# Altium PCB Wi-FiR.PcbDoc (part 3 of 3)
Units mm, origin at the board's own origin, x right, y up, seen from the top; angles counter-clockwise.
Board outline 58.03 x 53.68 mm, 2 copper layers (Top Layer, Bottom Layer); 105 components, 77 nets, 361 pads, 200 vias.
Unrouted connection lines stored in the file: 1.
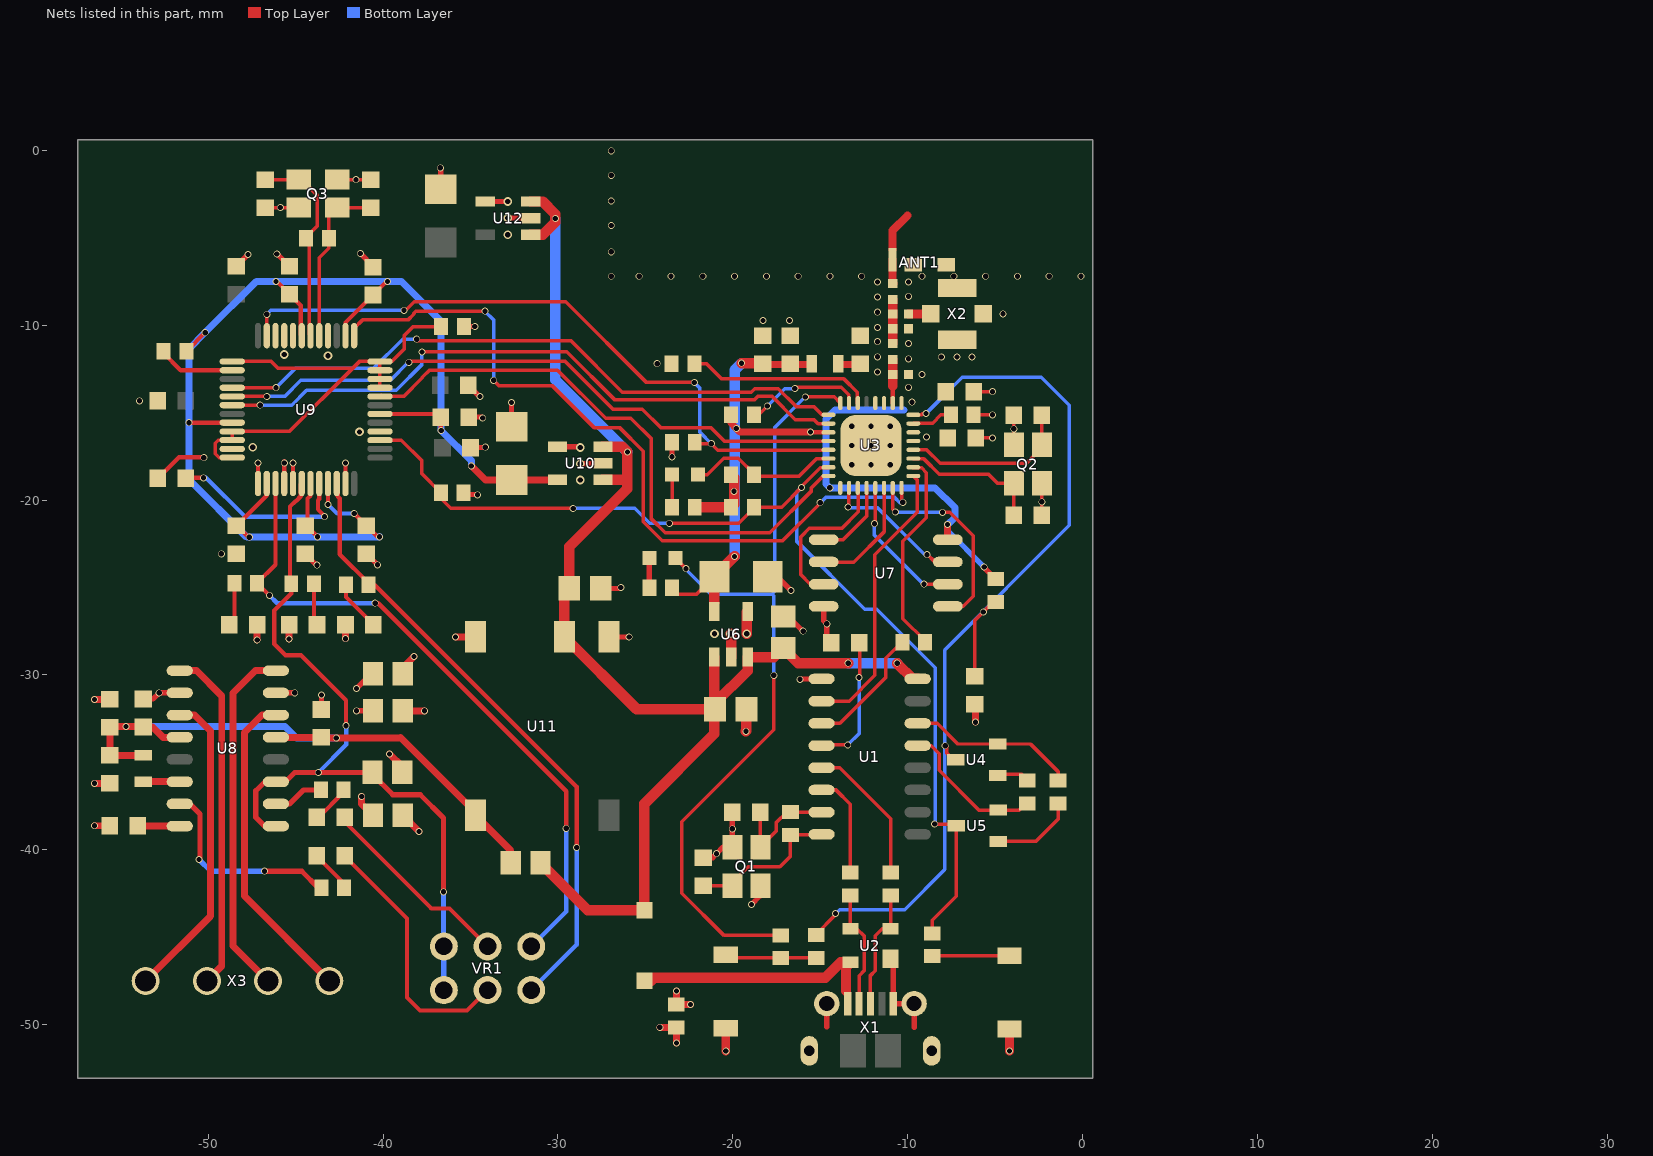
[diagram p2: the nets of this part, all layers, seen from the top]

## Via types
v1: diameter 0.4, hole 0.3, Top Layer to Bottom Layer, tented both sides, 178 vias
v2: diameter 0.5, hole 0.3, Top Layer to Bottom Layer, tented both sides, 13 vias
v3: diameter 0.5, hole 0.3, Top Layer to Bottom Layer, 9 vias

## Nets (pads, with @x,y where several pads share a name; then routed paths per layer and width w, separated by ;. In a path a pad name is that pad's centre, name@x,y a point inside that pad or via, vN(x,y) a via of type N, cw(c..) or ccw(c..) an arc to the next point about the centre after c; other vN are vias at no path point) (continued)
3v3: C23.1 C24.2 C25.2 C26.2 C36.2 C37.2 C38.2 R25.1 U9.6 U9.14 U9.19 U9.32 U9.38 U9.43 U9.45 U10.5 | length 79.8
  Top Layer w0.24: R25.1@-51.25,-11.5 v1(-50.175,-10.425) ; v1(-51.1,-15.575) U9.32@-48.625,-15.575 ; C24.2@-48.4,-21.475 C24.2@-48.396,-21.475 ; v1(-47.65,-22.125) -47.7,-22.125 -48.35,-21.475 C24.2@-48.396,-21.475 ; U9.38@-46.65,-19.05 -46.65,-19.725 -46.705,-19.78 -46.705,-19.784 C24.2@-48.396,-21.475 ; v1(-46.125,-7.5) -46.075,-7.5 C37.2@-45.35,-8.225 -44.705,-8.87 -44.705,-10.545 U9.19@-44.65,-10.6 ; U9.43@-44.15,-19.05 -44.15,-19.751 -44.315,-19.916 -44.315,-21.34 C26.2@-44.45,-21.475 -44.375,-21.475 v1(-43.75,-22.1) ; v1(-43.15,-20.25) U9.45@-43.15,-19.05 ; U9.14@-42.15,-10.6 -42.15,-9.85 C38.2@-40.575,-8.275 -39.8,-7.5 v1(-39.752,-7.5) ; v1(-41.65,-20.775) C25.2@-40.95,-21.475 -40.325,-22.1 v1(-40.2,-22.1) ; U9.6@-40.175,-15.075 C36.2@-36.7,-15.075 ; C36.2@-36.7,-15.25 -36.7,-16 v1(-36.675,-16.025)
  Top Layer w0.4: v1(-34.95,-18.05) -34.15,-18.85 C23.1@-32.65,-18.85 U10.5@-30.025,-18.85
  Bottom Layer w0.24: v1@-46.125,-7.55 v1(-46.125,-7.5) ; v1(-43.15,-20.25) -42.625,-20.775 v1(-41.65,-20.775) ; v1(-39.752,-7.5) -39.75,-7.498 v1@-39.75,-7.475
  Bottom Layer w0.4: v1@-40.2,-22.075 v1(-40.2,-22.1) v1(-43.75,-22.1) -47.625,-22.1 v1(-47.65,-22.125) -47.794,-22.125 -51.1,-18.819 v1(-51.1,-15.575) -51.1,-11.35 v1(-50.175,-10.425) -47.25,-7.5 v1(-39.752,-7.5) -38.946,-7.5 -36.675,-9.771 v1(-36.675,-16.025) -34.95,-17.75 v1(-34.95,-18.05)
+5V: C1.2 C15.2 C42.2 D1.2 R30.1 U1.16 U6.1 U6.3 U10.1 U10.3 U11.2 U12.1 U12.3 | length 81.9
  Top Layer w0.6: U12.1@-31.55,-4.825 -30.872,-4.825 -30.15,-4.103 v1(-30.15,-3.9) -30.15,-3.647 -30.872,-2.925 U12.3@-31.55,-2.925 ; R30.1@-31,-40.75 -28.3,-43.45 D1.2@-25.05,-43.45 -25.05,-37.375 -21.05,-33.375 C15.2@-21.05,-31.95 ; U10.1@-27.425,-18.85 -26.075,-18.85 -26.025,-18.8 ; U10.3@-27.425,-16.95 -26.325,-16.95 v1(-26.025,-17.25) -26.025,-18.8 ; U6.1@-21.05,-28.975 C15.2@-21.05,-31.95 ; v1(-13.4,-29.325) -16.25,-29.325 C1.2@-17.125,-28.45 -17.65,-28.975 U6.3@-19.15,-28.975 -19.15,-29.75 -21.025,-31.625 C15.2@-21.025,-31.95 C15.2@-21.05,-31.95 ; v1(-10.6,-29.325) -10.6,-29.35 -9.72,-30.23 U1.16@-9.425,-30.23 ; -26.025,-18.8 -26.025,-19.35 -29.35,-22.675 C42.2@-29.35,-25.05 -29.63,-25.33 U11.2@-29.63,-27.825 -25.505,-31.95 C15.2@-21.05,-31.95
  Bottom Layer w0.6: v1(-30.15,-3.9) -30.15,-13.125 v1(-26.025,-17.25) ; v1(-13.4,-29.325) v1(-10.6,-29.325)
ADC: R17.2 U3.6 | length 10.7
  Top Layer w0.2: R17.2@-22.2,-12.2 -21.5,-12.2 -20.624,-13.076 -13.641,-13.076 -12.875,-13.842 -12.875,-14.45 U3.6@-12.85,-14.45 U3.6@-12.825,-14.425
AGND: C32.2 C33.2 C34.2 C41.1 R22.1 R27.2 U9.37 U9.40 U9.41 U9.47 | length 13.7
  Top Layer w0.24: C41.1@-52.875,-18.75 -51.675,-17.55 -50.225,-17.55 v1(-50.25,-17.575) ; U9.37@-47.15,-19.05 v1(-47.15,-17.875) ; U9.40@-45.65,-19.05 v1(-45.65,-17.875) v1@-45.65,-17.775 ; U9.41@-45.15,-19.05 v1(-45.15,-17.875) v1@-45.15,-17.8 ; U9.47@-42.15,-19.05 v1(-42.15,-17.875) v1@-42.15,-17.85
  Top Layer w0.4: v1(-47.2,-28) C33.2@-47.2,-27.125 ; v1(-45.375,-27.95) C34.2@-45.375,-27.125 ; v1(-42.15,-27.925) C32.2@-42.15,-27.125 ; R22.1@-38.875,-38.025 v1(-37.95,-38.95) ; v1(-24.175,-50.15) R27.2@-23.225,-50.15 v1(-23.225,-51.05)
AMP_GND: C18.1 C19.1 C22.2 R19.2 R21.1 R22.2 U11.4 | length 7.7
  Top Layer w0.4: v1(-56.5,-38.625) C22.2@-55.625,-38.625 ; v1(-56.5,-36.2) C19.1@-55.625,-36.2 ; v1(-56.5,-31.4) C18.1@-55.625,-31.4 ; v1(-41.225,-36.95) -41.225,-37.375 R22.2@-40.575,-38.025 ; v1(-39.625,-34.525) -38.9,-35.25 R19.2@-38.9,-35.575 ; R21.1@-38.875,-32.05 v1(-37.625,-32.05) ; v1(-35.85,-27.825) U11.4@-34.71,-27.825
AMP_PWR: C18.2 C19.2 C20.2 C21.2 L3.1 R30.2 U8.4 U8.13 U11.5 | length 37
  Top Layer w0.4: L3.1@-53.725,-34.6 C19.2@-55.625,-34.6 C18.2@-55.625,-33 -55.575,-32.95 v1(-54.7,-32.95) -53.75,-32.95 C20.2@-53.725,-32.975 -53.175,-32.975 -52.585,-33.565 U8.4@-51.625,-33.565 ; U8.13@-46.125,-33.565 -46.115,-33.575 C21.2@-43.525,-33.575 -43.5,-33.6 v1(-42.675,-33.6) -39.039,-33.6 -39.014,-33.575 -34.71,-37.879 U11.5@-34.71,-38.025 -32.7,-40.035 R30.2@-32.7,-40.75
  Bottom Layer w0.4: v1(-54.7,-32.95) -45.6,-32.95 -44.95,-33.6 v1(-42.675,-33.6)
APWR: C3.2 C4.2 C5.2 C6.2 C17.1 L1.1 R6.1 R8.2 R14.1 R33.1 R34.1 R35.1 U3.1 U3.11 U3.17 U3.29 U3.30 U6.5 U7.8 | length 54.2
  Top Layer w0.2: R8.2@-23.475,-25.025 -23.125,-25.375 -22.05,-25.375 C17.1@-21.05,-24.375
  Top Layer w0.24: R34.1@-20.1,-15.6 R34.1@-20.1,-15.125 ; v1@-15.55,-16.125 U3.11@-14.525,-16.125
  Top Layer w0.3: v1(-5.625,-23.825) -5.625,-23.85 R35.1@-5.05,-24.425
  Top Layer w0.4: R34.1@-20.1,-15.6 v1(-19.8,-15.9) -19.6,-16.1 v1(-15.55,-16.1) ; C6.2@-18.275,-12.25 -16.725,-12.25 L1.1@-15.475,-12.25 ; v1(-7.725,-21.4) -7.725,-22.245 U7.8@-7.7,-22.27
  Top Layer w0.6: R14.1@-22.175,-20.4 R6.1@-20.1,-20.4 -19.925,-20.225 v1(-19.925,-19.5) -19.925,-18.725 R33.1@-20.1,-18.55 ; U6.5@-21.05,-25.85 C17.1@-21.05,-24.375 v1(-19.9,-23.225) ; v1(-19.5,-12.175) -18.35,-12.175 C6.2@-18.275,-12.25
  Bottom Layer w0.3: v1(-7.725,-21.4) -7.725,-21.725 v1(-5.625,-23.825)
  Bottom Layer w0.4: -10.2,-14.85 -14.15,-14.85 -14.675,-15.375 -14.675,-19.075 v1(-14.45,-19.3) -8.431,-19.3 -7.3,-20.431 -7.3,-20.994 -7.706,-21.4 v1(-7.725,-21.4)
  Bottom Layer w0.6: v1(-19.9,-23.225) -19.9,-12.575 v1(-19.5,-12.175)
  other v1: -8.925,-16.4 -9.75,-14.4
CN-PD: R34.2 U3.7 | length 6.7
  Top Layer w0.2: R34.2@-18.8,-15.125 -18.525,-15.125 v1(-18.025,-14.625) ; v1(-16.451,-13.626) -16.376,-13.551 -13.803,-13.551 -13.375,-13.978 -13.375,-14.425 U3.7@-13.35,-14.45
  Bottom Layer w0.2: v1(-18.025,-14.625) -17.026,-13.626 v1(-16.451,-13.626)
DTR: R4.2 U1.13 U5.2 | length 8.6
  Top Layer w0.2: U1.13@-9.425,-34.04 -8.66,-34.04 -8.2,-34.5 -8.2,-35.45 -5.925,-37.725 U5.2@-4.825,-37.725 -3.625,-37.725 R4.2@-3.15,-37.25
GB: R19.1 R24.1 U8.9 U8.11 U9.42 VR1.1 VR1.1' | length 45.2
  Top Layer w0.24: U9.42@-44.65,-19.05 -44.705,-19.105 -44.705,-19.784 -44.966,-20.045 -44.995,-20.045 -45.32,-20.37 -45.32,-24.775 R24.1@-45.25,-24.775 -45.25,-25.35 -46.22,-26.32 -46.22,-28.23 -45.575,-28.875 -44.7,-28.875 -42.125,-31.45 v1(-42.125,-32.9)
  Top Layer w0.3: U8.9@-46.125,-38.645 -46.78,-38.645 -47.275,-38.15 -47.275,-36.625 -46.755,-36.105 U8.11@-46.125,-36.105 -45.58,-36.105 -45.05,-35.575 R19.1@-40.6,-35.575 -40.6,-35.691 -39.441,-36.85 -37.875,-36.85 -36.55,-38.175 v1(-36.55,-42.4)
  Bottom Layer w0.24: v1(-43.7,-35.575) -42.105,-33.98 -42.105,-32.92 v1(-42.125,-32.9)
  Bottom Layer w0.3: v1(-36.55,-42.4) -36.55,-45.5 VR1.1@-36.525,-45.525 VR1.1'@-36.525,-48.025
GND: ANT1.1@-7.8,-6.54 ANT1.1@-9.68,-6.54 C1.1 C2.2 C3.1 C4.1 C5.1 C6.1 C7.1 C8.1 C9.1 C10.1 C11.1 C12.1 C13.1 C14.1 C15.1 C17.2 C23.2 C24.1 C25.1 C26.1 C27.2 C28.1 C29.1 C30.1 C31.1 C36.1 C37.1 C38.1 C39.1 C40.1 C42.1 Q1.2 Q1.4 Q2.2 Q2.4 Q3.2 Q3.4 R3.2 R13.1 R17.1 R26.1 R27.1 R28.1 R29.1 SW1.1 SW2.2 U1.1 U2.1 U3.33 U6.2 U6.4 U7.4 U9.4 U9.16 U9.20 U9.21 U9.22 U9.35 U10.2 U10.4 U11.1 U12.2 U12.4 X1.5 X2.2 X2.3 X2.4 | length 59.4
  Top Layer w0.2: C39.1@-46.725,-3.275 v1(-45.875,-3.275) Q3.4@-44.825,-3.275 ; Q3.2@-42.625,-1.675 v1(-41.55,-1.675) C40.1@-40.7,-1.675 ; R3.2@-6.225,-15.125 v1@-5.3,-15.125 ; C3.1@-6.225,-13.8 v1@-5.325,-13.8 ; C4.1@-6.1,-16.45 v1(-5.15,-16.45) ; Q2.2@-3.925,-16.85 v1(-3.925,-15.925) C12.1@-3.925,-15.15 ; C13.1@-2.325,-20.875 v1(-2.325,-20.1) Q2.4@-2.325,-19.05
  Top Layer w0.3: C30.1@-48.4,-6.625 v1(-47.725,-5.95) ; v1(-46.075,-5.925) -46.05,-5.925 C37.1@-45.35,-6.625 ; C26.1@-44.45,-23.075 -43.8,-23.725 v1(-43.775,-23.725) ; v1(-41.3,-5.9) -40.575,-6.625 C38.1@-40.575,-6.675 ; C25.1@-40.95,-23.075 v1(-40.325,-23.7) ; v1(-36.725,-1) -36.7,-1.025 C27.2@-36.7,-2.225 ; R29.1@-35.4,-19.575 -35.3,-19.675 -34.625,-19.675 v1(-34.6,-19.7) ; R26.1@-35.375,-10.075 v1(-34.75,-10.075) ; C29.1@-35.125,-13.425 -34.475,-14.075 v1(-34.45,-14.075) ; C36.1@-35.1,-15.25 -34.35,-15.25 v1(-34.3,-15.3) ; C28.1@-35,-17 -34.175,-17 v1(-34.15,-16.975) ; U12.4@-34.15,-2.925 v2(-32.875,-2.925) ; v2(-32.875,-3.875) U12.2@-31.55,-3.875 ; C23.2@-32.65,-15.8 v1(-32.65,-14.425) ; U10.4@-30.025,-16.95 -28.775,-16.95 v2(-28.725,-17) ; v2(-28.725,-17.925) -27.45,-17.925 U10.2@-27.425,-17.9 ; C42.1@-27.55,-25.05 -26.45,-25.05 v1(-26.4,-25) ; U11.1@-27.09,-27.825 v1(-25.925,-27.825) ; R17.1@-23.65,-12.2 R17.1@-23.5,-12.2 ; v1(-23.475,-17.525) R13.1@-23.475,-16.7 ; C9.1@-21.7,-40.45 -21.15,-40.45 v1(-20.925,-40.225) -20.55,-39.85 Q1.4@-20.025,-39.85 v1(-20.025,-38.8) C8.1@-20.025,-37.85 ; v1(-18.925,-43.125) -18.425,-42.625 Q1.2@-18.425,-42.05 ; C17.2@-18,-24.375 -17.475,-24.375 v1(-16.675,-25.175) ; C1.1@-17.125,-26.65 -16.825,-26.65 v1(-15.975,-27.5) ; v1(-16.15,-30.25) -16.13,-30.23 U1.1@-14.925,-30.23 ; U7.4@-14.8,-26.08 -14.8,-26.9 v1(-14.625,-27.075) -14.625,-27.9 C2.2@-14.375,-28.15 ; -14.625,-50.125 X1.5@-14.625,-48.8 ; U2.1@-10.98,-46.225 -10.825,-46.38 X1.5@-10.825,-48.8 X1.5@-9.625,-48.8 -9.625,-50.15
  Top Layer w0.4: R28.1@-38.875,-29.925 -38.875,-29.6 v1(-38.225,-28.95) ; v1(-23.225,-48.075) R27.1@-23.225,-48.85 v1(-22.425,-48.85) ; C14.1@-6.175,-31.675 -6.075,-31.775 -6.125,-31.825 v1(-6.125,-32.7)
  Top Layer w0.5: v1(-20.4,-51.5) SW1.1@-20.4,-50.2 ; X1.5@-15.625,-51.5 X1.5@-15.6,-51.475 ; X1.5@-8.625,-51.5 X1.5@-8.625,-51.157 ; v1(-4.175,-51.5) SW2.2@-4.175,-50.25
  Top Layer w0.6: v2(-20.125,-27.65) -20.1,-27.675 U6.2@-20.1,-28.975 ; v1(-19.25,-33.225) -19.225,-33.2 C15.1@-19.225,-31.95 ; v2(-19.2,-27.65) -19.2,-26.425 U6.4@-19.15,-26.375
  other v1: -49.25,-23.075 -5.15,-15.125 -53.925,-14.325 -5.15,-13.8 -9.95,-13.55 -9.175,-12.825 -11.725,-12.675 -24.325,-12.2 -9.95,-11.925 -11.725,-11.808 -8.075,-11.825 -7.175,-11.825 -6.325,-11.825 -9.95,-11.05 -11.725,-10.942 -11.725,-10.125 -18.275,-9.725 -16.75,-9.725 -4.55,-9.35 -11.725,-9.258 -11.725,-8.392 -9.95,-8.35 -11.725,-7.525 -9.95,-7.525 -26.95,-7.2 -25.35,-7.2 -23.532,-7.2 -21.714,-7.2 -19.896,-7.2 -18.079,-7.2 -16.261,-7.2 -14.443,-7.2 -12.625,-7.2 -9.175,-7.2 -7.357,-7.2 -5.539,-7.2 -3.721,-7.2 -1.904,-7.2 -0.086,-7.2 -26.95,-5.8 -26.95,-4.3 -26.95,-2.9 -26.95,-1.425 -26.95,-0.025
  other v2: -21.05,-27.65 -28.725,-18.85 -47.45,-16.975 -41.35,-16.1 -43.15,-11.75 -45.65,-11.675 -32.875,-4.825
  other v3: -13.2,-17.975 -12.1,-17.975 -11,-17.975 -13.2,-16.875 -12.1,-16.875 -11,-16.875 -13.2,-15.775 -12.1,-15.775 -11,-15.775
GPIO00: R6.2 R15.1 R29.2 U3.15 U5.3 U9.3 | length 60.4
  Top Layer w0.2: U9.3@-40.175,-16.575 -38.95,-16.575 -37.8,-17.725 -37.8,-18.475 R29.2@-36.7,-19.575 -36.7,-19.9 -36.125,-20.475 v1(-29.125,-20.475) ; v1(-23.626,-21.326) -19.656,-21.326 -18.8,-20.47 R6.2@-18.8,-20.4 ; R6.2@-18.575,-20.4 -17.191,-20.4 v1(-16.075,-19.284) -16.075,-19.228 -14.997,-18.15 -14.55,-18.15 U3.15@-14.525,-18.125 ; R15.1@-8.6,-44.775 -8.6,-44.025 -7.225,-42.65 U5.3@-7.225,-38.625 -7.323,-38.527 v1(-8.45,-38.527)
  Bottom Layer w0.2: v1(-29.125,-20.475) -25.6,-20.475 -24.749,-21.326 v1(-23.626,-21.326) ; v1(-16.075,-19.284) -16.327,-19.536 -16.327,-22.373 -12.45,-26.25 -11.775,-26.25 -8.425,-29.6 -8.425,-38.502 v1(-8.45,-38.527)
GPIO02: D4.2 R33.2 U3.14 | length 8.7
  Top Layer w0.2: D4.2@-21.975,-18.55 -21.47,-18.55 -20.52,-17.6 -19.68,-17.6 -18.8,-18.48 R33.2@-18.8,-18.55 ; R33.2@-18.775,-18.625 -16.194,-18.625 -15.219,-17.65 -14.55,-17.65 U3.14@-14.525,-17.625
GPIO04: U3.16 U9.8 | length 34.4
  Top Layer w0.2: U9.8@-40.1,-14 U9.8@-40.175,-14.075 -38.825,-14.075 -37.75,-13 -37.75,-12.98 -37.345,-12.575 -30.025,-12.575 -27.275,-15.325 -25.825,-15.325 -24.675,-16.475 -24.675,-21.055 -23.854,-21.876 -20.29,-21.876 -20.289,-21.875 -19.461,-21.875 -19.46,-21.876 -17.89,-21.876 -15.525,-19.512 -15.525,-19.315 -14.835,-18.625 U3.16@-14.525,-18.625
GPIO05: U3.24 U9.13 | length 44.1
  Top Layer w0.2: U9.13@-41.65,-10.6 -41.65,-10.175 -41.175,-9.7 -38.572,-9.7 -38.25,-9.378 -38.25,-9.33 -38.12,-9.2 v1(-34.175,-9.2) ; v1(-33.675,-13.15) -33.375,-13.45 -30.336,-13.45 -27.936,-15.85 -26.475,-15.85 -25.125,-17.2 -25.125,-21.241 -24.04,-22.326 -20.104,-22.326 -20.103,-22.325 -19.647,-22.325 -19.646,-22.326 -17.154,-22.326 -15,-20.172 v1(-15,-20.15) ; U3.24@-10.35,-19.3 -10.35,-20.051 v1(-10.276,-20.126)
  Bottom Layer w0.2: v1(-34.175,-9.2) -33.675,-9.7 v1(-33.675,-13.15) ; v1(-15,-20.15) -14.978,-20.15 -14.678,-19.85 -10.749,-19.85 -10.448,-20.151 -10.276,-20.151 v1(-10.276,-20.126)
GPIO12: U3.10 U9.30 | length 37.7
  Top Layer w0.2: U9.30@-48.625,-14.575 v1(-47.025,-14.575) ; v1(-37.775,-11.525) -29.489,-11.525 -26.739,-14.275 -18.761,-14.275 -18.561,-14.075 -17.75,-14.075 -16.429,-15.396 -15.354,-15.396 -15.125,-15.625 U3.10@-14.525,-15.625 U3.10@-14.55,-15.6
  Bottom Layer w0.2: v1(-47.025,-14.575) -45.225,-14.575 -44.375,-13.725 -39.25,-13.725 -37.775,-12.25 v1(-37.775,-11.525)
GPIO13: U3.12 U9.29 | length 36.9
  Top Layer w0.2: U9.29@-48.625,-14.075 v1(-46.65,-14.075) ; v1(-38.525,-12.125) -38.525,-12.175 -38.425,-12.075 -29.575,-12.075 -26.85,-14.8 -25.175,-14.8 -24.125,-15.85 -21.25,-15.85 -20.45,-16.65 -14.55,-16.65 U3.12@-14.525,-16.625
  Bottom Layer w0.2: v1(-46.65,-14.075) -45.625,-14.075 -44.7,-13.15 -39.575,-13.15 -38.55,-12.125 v1(-38.525,-12.125)
GPIO14: U3.9 U9.28 | length 37.2
  Top Layer w0.2: U9.28@-48.601,-13.6 U9.28@-48.625,-13.575 v1(-46.125,-13.575) ; v1(-38.075,-10.8) -37.975,-10.9 -29.236,-10.9 -26.311,-13.825 -18.948,-13.825 -18.748,-13.625 -17.4,-13.625 -16.374,-14.651 -15.374,-14.651 -14.9,-15.125 U3.9@-14.525,-15.125
  Bottom Layer w0.2: v1(-46.125,-13.575) -45.025,-12.475 -40.55,-12.475 -38.875,-10.8 v1(-38.075,-10.8)
GPIO15: R13.2 U3.13 U9.23 | length 39.6
  Top Layer w0.2: U9.23@-46.65,-10.6 v1(-46.65,-9.375) ; v1(-38.8,-9.15) -38.706,-9.15 -38.206,-8.65 -29.561,-8.65 -24.936,-13.275 v1(-22.2,-13.275) ; R13.2@-22.175,-16.775 -22.15,-16.75 -22.125,-16.775 v1(-21.225,-16.775) -20.85,-17.15 -14.55,-17.15 U3.13@-14.525,-17.125
  Bottom Layer w0.2: v1(-46.65,-9.375) -46.425,-9.15 v1(-38.8,-9.15) ; v1(-22.2,-13.275) -21.875,-13.6 -21.875,-16.125 v1(-21.225,-16.775)
GPIO16: D5.2 R10.1 U3.8 | length 46.7
  Top Layer w0.2: D5.2@-23.275,-23.325 v1(-22.675,-23.925) ; v1(-17.65,-30.025) -17.65,-33.125 -22.925,-38.4 -22.925,-42.475 -20.5,-44.9 R10.1@-17.25,-44.9 R10.1@-17.2,-44.95 ; v1(-15.854,-14.101) -14.199,-14.101 U3.8@-13.85,-14.45
  Bottom Layer w0.2: v1@-22.65,-23.9 -22.65,-23.975 -21.25,-25.375 -17.75,-25.375 ; v1(-17.65,-30.025) -17.65,-25.475 -17.75,-25.375 ; v1(-15.854,-14.101) -17.6,-15.847 -17.6,-25.225 -17.75,-25.375
L: R32.2 U8.7 | length 11.7
  Top Layer w0.3: U8.7@-51.625,-37.375 -51.05,-37.375 -50.475,-37.95 -50.475,-40.525 -50.5,-40.55 v1(-50.525,-40.55) ; v1(-46.775,-41.225) -44.65,-41.225 -43.7,-42.175 R32.2@-43.525,-42.175
  Bottom Layer w0.3: v1(-50.525,-40.55) -49.85,-41.225 v1(-46.775,-41.225)
LO: R18.1 U9.46 VR1.3' | length 35.9
  Top Layer w0.24: U9.46@-42.65,-19.05 -42.595,-19.105 -42.595,-19.784 -42.475,-19.904 -42.475,-23.102 -40.825,-24.752 R18.1@-40.825,-24.85 -40.475,-24.85 -28.925,-36.4 v1(-28.925,-39.875)
  Bottom Layer w0.24: VR1.3'@-31.525,-48.025 -28.925,-45.425 v1(-28.925,-39.875)
NetANT1_1: ANT1.1@-10.855,-6.25 R2.1 | length 1.4
  Top Layer w0.46: ANT1.1@-10.855,-6.25 -10.855,-7.62 R2.1@-10.85,-7.625
  Top Layer w0.52: R2.1@-10.85,-7.625 R2.1@-10.85,-7.62
NetC2_1: C2.1 U1.4 | length 8.1
  Top Layer w0.2: U1.4@-15.41,-34.04 U1.4@-14.925,-34.04 -14.885,-34 v1(-13.425,-34) ; v1(-12.775,-30.15) -12.75,-30.125 -12.75,-28.175 C2.1@-12.775,-28.15
  Bottom Layer w0.2: v1(-13.425,-34) -12.775,-33.35 v1(-12.775,-30.15)
NetC7_2: C7.2 L1.2 U3.3 U3.4 | length 1.3
  Top Layer w0.4: L1.2@-13.975,-12.25 C7.2@-12.7,-12.25
NetC8_2: C8.2 Q1.1 R1.1 U1.7 | length 6.6
  Top Layer w0.2: C8.2@-18.425,-37.85 Q1.1@-18.425,-39.85 -17.525,-38.95 -17.525,-38.455 -16.92,-37.85 R1.1@-16.7,-37.85 U1.7@-14.925,-37.85
NetC9_2: C9.2 Q1.3 R1.2 U1.8 | length 8.8
  Top Layer w0.2: C9.2@-21.725,-42.05 Q1.3@-20.025,-42.05 -20.025,-41.88 -19.12,-40.975 -17.3,-40.975 -16.7,-40.375 R1.2@-16.7,-39.15 -14.955,-39.15 U1.8@-14.925,-39.12
NetC10_2: C10.2 L2.1 R2.2 R5.2 | length 2.5
  Top Layer w0.52: L2.1@-10.85,-11.05 C10.2@-10.85,-10.2 R5.2@-10.85,-9.35 R2.2@-10.85,-8.525
NetC12_2: C12.2 Q2.3 U3.28 | length 9.9
  Top Layer w0.2: U3.28@-9.675,-17.125 -8.92,-17.125 -8.145,-17.9 -3.205,-17.9 -2.325,-17.02 Q2.3@-2.325,-16.85 C12.2@-2.325,-15.15
NetC13_2: C13.2 Q2.1 U3.27 | length 8.2
  Top Layer w0.2: U3.27@-9.675,-17.625 -9.65,-17.65 -9.067,-17.65 -8.192,-18.525 -5.375,-18.525 -4.85,-19.05 Q2.1@-3.925,-19.05 C13.2@-3.925,-20.875
NetC22_1: C22.1 U8.8 | length 2.4
  Top Layer w0.4: C22.1@-54.025,-38.625 -54.005,-38.645 U8.8@-51.625,-38.645
NetC32_1: C32.1 R18.2 | length 2.9
  Top Layer w0.24: R18.2@-42.125,-24.85 -42.125,-25.55 C32.1@-40.55,-27.125
NetC33_1: C33.1 R20.2 | length 2.5
  Top Layer w0.24: C33.1@-48.8,-27.125 -48.5,-26.825 R20.2@-48.5,-24.75
NetC34_1: C34.1 R24.2 | length 2.4
  Top Layer w0.24: R24.2@-43.95,-24.775 -43.95,-26.95 C34.1@-43.775,-27.125
NetC39_2: C39.2 Q3.1 R23.1 U9.18 | length 11.7
  Top Layer w0.2: C39.2@-46.725,-1.675 Q3.1@-44.825,-1.675 -44.655,-1.675 -43.775,-2.555 -43.775,-4.33 -44.4,-4.955 R23.1@-44.4,-5.025 -44.225,-5.2 -44.225,-10.525 U9.18@-44.15,-10.6
NetC40_2: C40.2 Q3.3 R23.2 U9.17 | length 9.7
  Top Layer w0.2: U9.17@-43.65,-10.6 -43.65,-6.15 -43.1,-5.6 R23.2@-43.1,-5.025 -43.1,-3.75 Q3.3@-42.625,-3.275 C40.2@-40.7,-3.275
NetC41_2: C41.2 U9.44 | length 11
  Top Layer w0.24: C41.2@-51.275,-18.75 -51.25,-18.775 -51.2,-18.725 v1(-50.275,-18.725) ; U9.44@-43.65,-19.05 -43.65,-19.944 -43.72,-20.014 -43.72,-20.53 -43.35,-20.9 v1(-43.35,-20.95)
  Bottom Layer w0.24: v1(-50.275,-18.725) -50.125,-18.725 -47.9,-20.95 v1(-43.35,-20.95)
NetC43_1: C43.1 VR1.2 | length 11.4
  Top Layer w0.24: C43.1@-42.2,-38.15 -42.2,-38.39 -37.24,-43.35 -36.2,-43.35 VR1.2@-34.025,-45.525
NetC43_2: C43.2 R31.1 | length 2.3
  Top Layer w0.24: C43.2@-43.8,-38.15 -43.698,-38.15 -42.25,-36.702 R31.1@-42.25,-36.575
NetC44_1: C44.1 VR1.2' | length 15
  Top Layer w0.24: C44.1@-42.2,-40.35 -38.625,-43.925 -38.625,-48.45 -37.88,-49.195 -35.195,-49.195 VR1.2'@-34.025,-48.025
NetC44_2: C44.2 R32.1 | length 2.5
  Top Layer w0.24: C44.2@-43.8,-40.35 -42.225,-41.925 R32.1@-42.225,-42.175
NetD1_1: D1.1 U2.4 X1.1 | length 14
  Top Layer w0.6: D1.1@-25.05,-47.5 -24.675,-47.5 -24.5,-47.325 -14.722,-47.325 -13.822,-46.425 U2.4@-13.27,-46.425 -13.525,-46.68 -13.525,-48.05
NetD4_1: D5.1 R8.1 | length 1.7
  Top Layer w0.3: R8.1@-24.775,-25.025 D5.1@-24.775,-23.325
NetD5_1: D4.1 R14.2 | length 1.8
  Top Layer w0.2: R14.2@-23.475,-20.4 D4.1@-23.475,-18.55
NetL3_2: L3.2 U8.6 | length 2.1
  Top Layer w0.4: L3.2@-53.725,-36.1 -51.63,-36.1 U8.6@-51.625,-36.105
NetR3_1: R3.1 U3.31 | length 2.4
  Top Layer w0.2: U3.31@-9.675,-15.625 -9.65,-15.6 -8.572,-15.6 -8.097,-15.125 R3.1@-7.525,-15.125
NetR4_1: R4.1 U4.1 | length 1.9
  Top Layer w0.2: U4.1@-4.85,-35.75 -4.775,-35.675 -3.475,-35.675 R4.1@-3.15,-36
NetR5_1: R5.1 X2.1 | length 1.3
  Top Layer w0.52: R5.1@-9.95,-9.35 X2.1@-8.675,-9.35
NetR7_1: R7.1 U5.1 | length 5
  Top Layer w0.2: U5.1@-4.825,-39.525 -2.675,-39.525 -1.4,-38.25 R7.1@-1.4,-37.35 R7.1@-1.4,-37.25
NetR9_1: R9.1 U2.2 X1.3 | length 7
  Top Layer w0.2: X1.3@-12.125,-48.8 -12.125,-47.186 -11.85,-46.911 -11.85,-44.925 -11.45,-44.525 U2.2@-10.98,-44.525 -10.98,-42.605 R9.1@-10.975,-42.6
NetR9_2: R9.2 U1.5 | length 8.2
  Top Layer w0.2: U1.5@-14.925,-35.31 -13.89,-35.31 -10.975,-38.225 R9.2@-10.975,-41.3
NetR10_2: R10.2 R11.1 SW1.2 | length 5.4
  Top Layer w0.2: SW1.2@-20.4,-46.175 R11.1@-15.225,-46.175 R11.1@-15,-46.175
NetR12_1: R12.1 U2.3 X1.2 | length 6.9
  Top Layer w0.2: R12.1@-13.275,-42.6 -13.27,-42.605 U2.3@-13.27,-44.525 -12.9,-44.525 -12.47,-44.955 -12.47,-46.895 -12.775,-47.2 X1.2@-12.775,-48.8
NetR12_2: R12.2 U1.6 | length 5.9
  Top Layer w0.2: U1.6@-14.925,-36.58 -14.095,-36.58 -13.275,-37.4 R12.2@-13.275,-41.3
NetR15_2: R15.2 SW2.1 | length 4.4
  Top Layer w0.2: R15.2@-8.6,-46.05 SW2.1@-4.175,-46.05
NetR16_1: R16.1 U3.26 | length 11.7
  Top Layer w0.2: U3.26@-9.675,-18.125 -9.7,-18.15 -9.203,-18.15 -8.925,-18.428 -8.925,-21.014 -10.275,-22.364 -10.275,-26.78 -9,-28.055 R16.1@-9,-28.125
NetR25_2: R25.2 U9.26 | length 4.4
  Top Layer w0.24: R25.2@-52.55,-11.5 -52.55,-11.598 -51.573,-12.575 U9.26@-48.625,-12.575
NetR26_2: R26.2 U9.9 U9.10 U9.11 U9.12 U9.25 U9.33 U9.34 U9.36 | length 26.6
  Top Layer w0.2: U9.36@-48.625,-17.575 -49.375,-17.575 -49.6,-17.35 -49.6,-16.75 -49.425,-16.575 U9.34@-48.625,-16.575 U9.33@-48.625,-16.075 -45.35,-16.075 -41.75,-12.475 ; U9.25@-48.625,-12.075 -46.4,-12.075 -46,-12.475 -41.75,-12.475 ; U9.9@-40.175,-13.575 U9.10@-40.175,-13.075 U9.11@-40.175,-12.575 U9.12@-40.175,-12.075 ; R26.2@-36.675,-10.075 -38.275,-10.075 -38.8,-10.6 -38.8,-11.375 -39.5,-12.075 U9.12@-40.175,-12.075 ; -41.75,-12.475 -41.35,-12.075 U9.12@-40.175,-12.075
NetU8_1: U8.1 X3.2 | length 19.7
  Top Layer w0.4: U8.1@-51.625,-29.755 -50.67,-29.755 -49.225,-31.2 -49.225,-46.65 X3.2@-50.075,-47.5
NetU8_3: U8.3 X3.1 | length 18
  Top Layer w0.4: X3.1@-53.575,-47.5 -49.875,-43.8 -49.875,-33.2 -50.78,-32.295 U8.3@-51.625,-32.295
NetU8_14: U8.14 X3.4 | length 18.4
  Top Layer w0.4: U8.14@-46.125,-32.295 -46.92,-32.295 -47.925,-33.3 -47.925,-42.65 X3.4@-43.075,-47.5
NetU8_16: U8.16 X3.3 | length 20.3
  Top Layer w0.4: X3.3@-46.575,-47.5 -48.575,-45.5 -48.575,-31.025 -47.305,-29.755 U8.16@-46.125,-29.755
nRST: C14.2 R11.2 R35.2 U3.32 U4.3 | length 54.7
  Top Layer w0.2: R11.2@-15.225,-44.875 -15.25,-44.85 -14.125,-43.725 v1(-14.125,-43.65) ; U3.32@-9.675,-15.125 -9.664,-15.114 -9.189,-15.114 -9.125,-15.05 v1(-8.95,-15.05) ; v1(-7.85,-34.05) -7.75,-34.15 -7.75,-34.475 -7.375,-34.85 U4.3@-7.25,-34.85 ; C14.2@-6.175,-30.075 -6.175,-26.9 v1(-5.675,-26.4) R35.2@-5.175,-25.9
  Bottom Layer w0.2: v1(-14.125,-43.65) -14.1,-43.65 -13.875,-43.425 -10.175,-43.425 -7.875,-41.125 -7.875,-28.575 -0.75,-21.45 -0.75,-14.575 -2.35,-12.975 -6.875,-12.975 v1(-8.95,-15.05)
PWR_GND: C20.1 C21.1 R21.2 R28.2 U8.2 U8.15 | length 6.4
  Top Layer w0.3: C20.1@-53.725,-31.375 -53.15,-31.375 v1(-52.8,-31.025) U8.2@-51.625,-31.025 ; U8.15@-46.125,-31.025 v1(-45.05,-31.025) ; C21.1@-43.525,-31.975 v1(-43.525,-31.15) ; v1(-41.525,-32.05) R21.2@-40.575,-32.05 ; v1(-41.525,-30.775) -40.625,-29.875 R28.2@-40.575,-29.925
R: R31.2 U8.10 | length 2.9
  Top Layer w0.3: U8.10@-46.125,-37.375 -45.35,-37.375 -44.55,-36.575 R31.2@-43.55,-36.575
RF: C11.2 L2.2 U3.2 | length 2.5
  Top Layer w0.25: U3.2@-10.85,-14.45 -10.85,-13.475
  Top Layer w0.52: -10.85,-13.475 C11.2@-10.85,-12.825 L2.2@-10.85,-11.95
RO: R20.1 U9.39 VR1.3 | length 39.4
  Top Layer w0.24: R20.1@-47.175,-24.775 v1(-46.5,-25.45) R20.1@-47.2,-24.75 -46.15,-23.7 U9.39@-46.15,-19.05 ; v1(-40.45,-25.9) -40.277,-25.9 -29.525,-36.652 v1(-29.525,-38.775)
  Bottom Layer w0.24: v1(-46.5,-25.45) -46.05,-25.9 v1(-40.45,-25.9) ; VR1.3@-31.525,-45.525 -29.525,-43.525 v1(-29.525,-38.775)
RTS: R7.2 U1.14 U4.2 | length 9.6
  Top Layer w0.2: U1.14@-9.425,-32.77 -8.305,-32.77 -7.125,-33.95 U4.2@-4.85,-33.95 -2.975,-33.95 -1.4,-35.525 R7.2@-1.4,-35.95
RXD0: U1.2 U3.25 | length 16.2
  Top Layer w0.2: U1.2@-14.925,-31.5 -13.347,-31.5 -11.875,-30.028 -11.875,-23.128 -9.45,-20.703 -9.45,-18.85 U3.25@-9.675,-18.625
SCK/CLK: U3.21 U7.6 | length 8.9
  Top Layer w0.2: v1(-11.9,-21.35) -11.85,-21.3 U3.21@-11.85,-19.3 U3.21@-11.875,-19.325 ; v1(-9.065,-24.81) U7.6@-7.7,-24.81 U7.6@-6.96,-24.81
  Bottom Layer w0.2: v1(-11.9,-21.35) -11.9,-22 -9.09,-24.81 v1(-9.065,-24.81)
SCS/CMD: U3.20 U7.1 | length 4.6
  Top Layer w0.2: U7.1@-14.8,-22.27 -13.695,-22.27 -12.35,-20.925 U3.20@-12.35,-19.3
SDI/SD1: U3.23 U7.5 | length 12.4
  Top Layer w0.2: U3.23@-10.825,-19.325 U3.23@-10.85,-19.3 -10.85,-20.527 v1(-10.702,-20.675) ; U7.5@-8.395,-26.08 U7.5@-7.7,-26.08 -6.83,-26.08 -6.255,-25.505 -6.255,-22.045 -7.6,-20.7 v1(-8,-20.7)
  Bottom Layer w0.2: v1(-10.702,-20.675) -10.677,-20.7 -7.95,-20.7 v1(-8,-20.7)
SDO/SD0: U3.22 U7.2 | length 6.7
  Top Layer w0.2: U7.2@-14.8,-23.54 -14.74,-23.6 -14.69,-23.55 -13.075,-23.55 -11.35,-21.825 U3.22@-11.35,-19.3
SHD/SD2: U3.18 U7.7 | length 8.2
  Top Layer w0.2: v1(-13.4,-20.4) -13.375,-20.375 -13.375,-19.325 U3.18@-13.35,-19.3 ; v1(-8.9,-23.125) -8.9,-23.075 -8.435,-23.54 U7.7@-7.7,-23.54
  Bottom Layer w0.2: v1(-13.4,-20.4) -13.375,-20.425 -11.729,-20.425 -9.029,-23.125 v1(-8.9,-23.125)
SWP/SD3: U3.19 U7.3 | length 8.7
  Top Layer w0.2: U7.3@-15.075,-24.75 -15.625,-24.75 -16.1,-24.275 -16.1,-22.101 -15.619,-21.62 -13.981,-21.62 -13.976,-21.625 -13.775,-21.625 -12.825,-20.675 -12.825,-19.325 U3.19@-12.85,-19.3
TXD0: R16.2 U1.3 | length 7.2
  Top Layer w0.2: U1.3@-14.925,-32.77 -13.87,-32.77 -11.25,-30.15 -11.25,-29.056 -10.319,-28.125 R16.2@-10.3,-28.125
pads on no net: U1.9 U1.10 U1.11 U1.12 U1.15 U3.5 U8.5 U8.12 U9.1 U9.2 U9.15 U9.27 U9.48 U11.8 X1.4 X1.8 X1.9

## Polygon pours and split planes (outlines as drawn)
GND on Top Layer "GND_L01_P088" (solid, remove dead copper, pour order 88): -57.45,-26.775 -54.575,-29.65 -48.2,-29.65 -48.2,-28.725 -48.2,-24.575 -48.2,-22.6 -51.3,-19.5 -53.575,-19.5 -53.575,-17.275 -39.375,-17.275 -25.275,-31.375 -25.275,-53.075 0.575,-53.075 0.575,-13.795 -11.5,-13.795 -11.5,-10.849 -26.375,-10.849 -26.375,0.61 -57.45,0.61
APWR on Top Layer "APWR_L01_P022" (solid, pour order 22): -10.125,-14.65 -9.425,-14.65 -8.275,-14.3 -8.275,-13.3 -9.425,-14.05 -10.325,-14.05 -10.4,-14.125 -10.4,-14.65
GND on Top Layer "GND_CONN_TOP" (solid, remove dead copper, pour order 10): -10.175,-13.8 0.575,-13.8 0.575,-6.9 0.45,-6.9 -10.175,-6.9 -10.175,-8.825 -8.725,-8.825 -8.725,-7.85 -5.625,-7.85 -5.625,-10.85 -8.725,-10.85 -8.725,-9.925 -10.175,-9.925
GND on Top Layer "GND_L01_P004" (solid, remove dead copper, pour order 4): -11.5,-11.425 -11.5,-6.9 -26.375,-6.9 -26.375,-11.425 -12,-11.4 -12,-13.375 -11.5,-13.375
NetC7_2 on Top Layer "NETC7_2_L01_P014" (solid, remove dead copper, pour order 14): -11.975,-14.45 -11.975,-14 -13.125,-12.85 -13.125,-12.65 -12.4,-12.65 -11.225,-13.825 -11.225,-14.45
APWR on Top Layer "APWR_L01_P024" (solid, pour order 24): -13.8,-19.65 -13.85,-19.7 -14.825,-19.7 -14.825,-19.025 -13.822,-19.025
APWR on Top Layer "APWR_L01_P020" (solid, pour order 20): -9.7,-16.014 -8.175,-15.95 -8.175,-16.95 -9.7,-16.696
GND on Top Layer "GND_L01_P048" (solid, pour order 48): -49,-17.375 -39.825,-17.375 -39.825,-9.475 -49,-9.475
GND on Bottom Layer "GND_L02_P068" (solid, remove dead copper, pour order 68): -25.275,-53.075 -25.275,-31.375 -39.375,-17.275 -53.6,-17.275 -53.6,-19.5 -51.3,-19.5 -48.05,-22.75 -40.275,-22.75 -39.65,-23.375 -39.65,-23.95 -40.275,-24.575 -48.2,-24.575 -48.2,-28.725 -38.75,-28.725 -38.325,-28.3 -37.575,-28.3 -37.575,-29.65 -38.925,-29.65 -54.575,-29.65 -57.4,-26.825 -57.4,0.75 -26.375,0.75 -26.375,-10.849 -26.1,-11.075 -10.95,-11.075 -10.95,-18.75 0.656,-18.75 0.656,-53.075
APWR on Bottom Layer "APWR_L02_P044" (solid, pour order 44): -8.601,-16.724 -8.601,-16.076 -9.426,-15.251 -9.426,-14.076 -10.074,-14.076 -10.209,-14.65 -10.209,-15.765 -9.249,-16.724
GND on Bottom Layer "GND_L02_P040" (solid, pour order 40): 0.575,-12.3 0.575,-6.9 -26.35,-6.9 -26.35,-12.55 -11.122,-12.55 -11.122,-15.075 -14.35,-15.075 -14.35,-18.825 -8.7,-18.825 -4.275,-23.25 0.575,-23.25
APWR on Bottom Layer "APWR_L02_P052" (solid, pour order 52): -15.8,-15.875 -15.45,-15.875 -14.675,-15.1 -14.675,-16.525 -14.875,-16.525 -15.125,-16.325 -15.175,-16.325 -15.8,-16.325
PWR_GND on Bottom Layer "PWR_GND_L02_P054" (solid, pour order 54): -39.775,-29.95 -39.775,-30.808 -41.07,-32.45 -44.75,-32.45 -44.95,-32.25 -53.15,-32.25 -53.975,-32.25 -54.475,-31.75 -54.475,-29.95
AMP_GND on Bottom Layer "AMP_GND_L02_P056" (solid, pour order 56): -33.575,-26.794 -33.575,-29.45 -42.675,-39.525 -57.45,-39.525 -57.45,-30.65 -55.775,-30.65 -55.5,-30.65 -55.5,-33.5 -52.5,-36.5 -43.281,-36.5 -36.45,-29.45 -36.45,-26.794
AGND on Bottom Layer "AGND_L02_P058" (solid, pour order 58): -50.525,-17.3 -49.3,-17.3 -49,-17.6 -40.275,-17.6 -26.45,-31.425 -26.45,-48.988 -25.612,-49.825 -22.4,-49.825 -22.4,-51.6 -26.45,-51.6 -28.225,-49.825 -28.225,-31.75 -40.7,-19.275 -49.05,-19.275 -50.525,-17.8
AGND on Bottom Layer "AGND_L02_P060" (solid, pour order 60): -39.425,-26.925 -36.724,-24.2 -36.563,-23.212 -34.7,-25.075 -35.638,-25.075 -39.1,-28.425 -47.675,-28.425 -47.675,-26.925
GND on Bottom Layer "GND_L02_P062" (solid, pour order 62): -24.375,-49.55 -24.35,-49.525 -22.175,-49.525 -21.325,-50.375 -21.325,-51.25 -19.725,-52.85 -4.375,-52.85 -2.975,-51.45 -2.975,-49.525 -5.025,-47.475 -24.375,-47.475
AGND on Bottom Layer "AGND_L02_P066" (solid, pour order 66): -27.725,-36.95 -34.75,-36.95 -37.625,-39.825 -38.65,-39.825 -38.65,-38.615 -35.585,-35.55 -27.7,-35.55

## Other copper
Top Layer:
  pour cut-out: -14.075,-52.6 -10.15,-52.6 -10.125,-52.625 -10.125,-50.55 -10.825,-49.85 -11.725,-49.85 -11.725,-47.946 -13.746,-47.946 -13.775,-47.975 -13.725,-48.025 -13.725,-50.025 -14.075,-50.375
  pour cut-out: -11.725,-49.85 -11.05,-49.85 -11.05,-47.95 -11.054,-47.946 -11.725,-47.946
  pour cut-out: -11.768,-47.946 -11.1,-47.946 -11.1,-46.95 -11.768,-46.95
  pour cut-out: -14.425,-52.875 -9.825,-52.875 -9.825,-49.525 -10.108,-49.525 -14.425,-49.525
Bottom Layer:
  pour cut-out: -9.25,-9.925 -8.1,-9.925 -8.075,-9.9 -8.075,-8.75 -9.25,-8.75
  pour cut-out: -8.725,-10.875 -5.575,-10.875 -5.575,-7.775 -8.725,-7.775

## Silkscreen, mask and mechanical layers (free items; w line width, h text height)
Top Overlay:
  lines w0.2: 5.6,-54.4 30.4,-54.4 30.4,5.4 5.6,5.4 5.6,-54.4
Top Solder:
  rectangle: -26.375,-6.925 0.6,0.625
Mechanical 3:
  the board outline again, w0.2

## Text inside footprints (layer, text, board x,y; h text height)
X3: Top Overlay "SPEAKERS" at -52.275,-42.65 h1; Top Overlay "+R" at -54.775,-52.6 h1; Top Overlay "-R" at -51.275,-52.6 h1; Top Overlay "-L" at -47.575,-52.6 h1; Top Overlay "+L" at -44.075,-52.6 h1